# Altium PCB GearBOX-Axis.PcbDoc
Units mm, origin at the board's own origin, x right, y up, seen from the top; angles counter-clockwise.
Board outline 22 x 22 mm, 2 copper layers (Top Layer, Bottom Layer), stack 1.18 mm thick; 3 components, 4 nets, 14 pads, 0 vias.
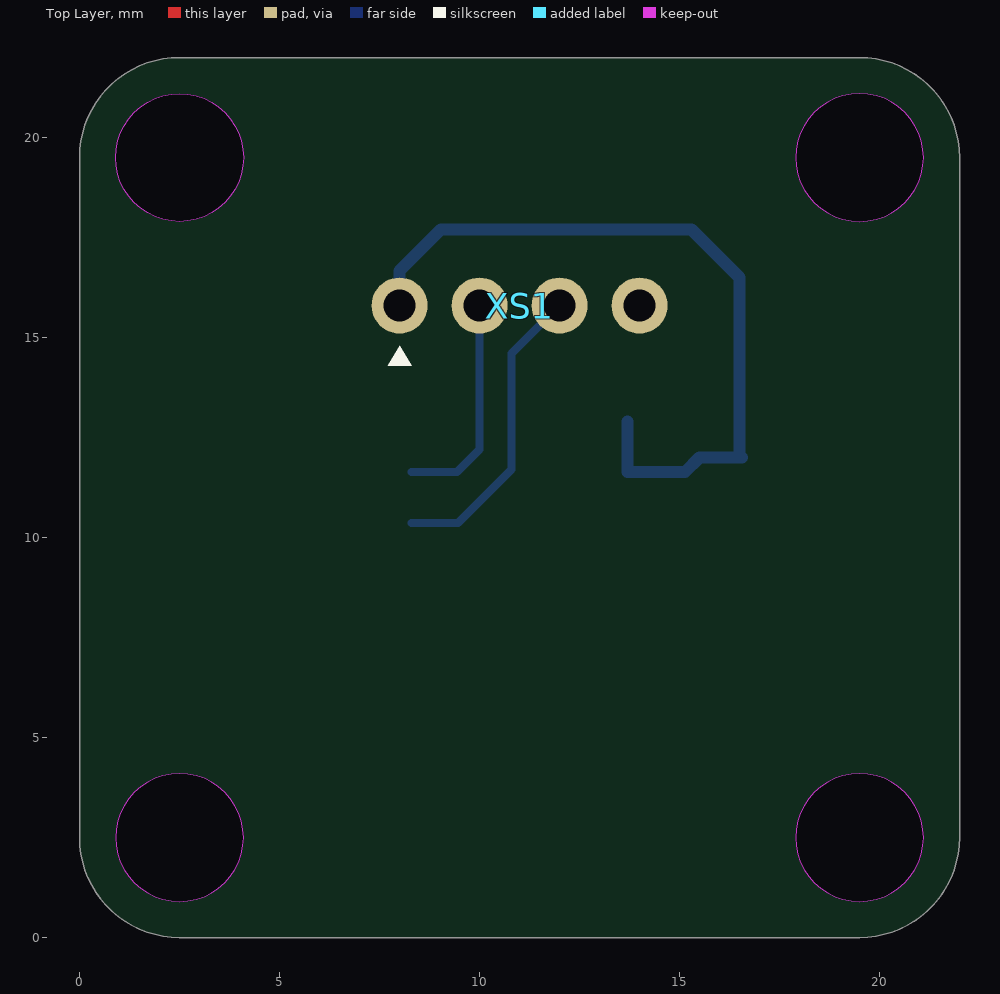
[diagram p0: Top Layer view]
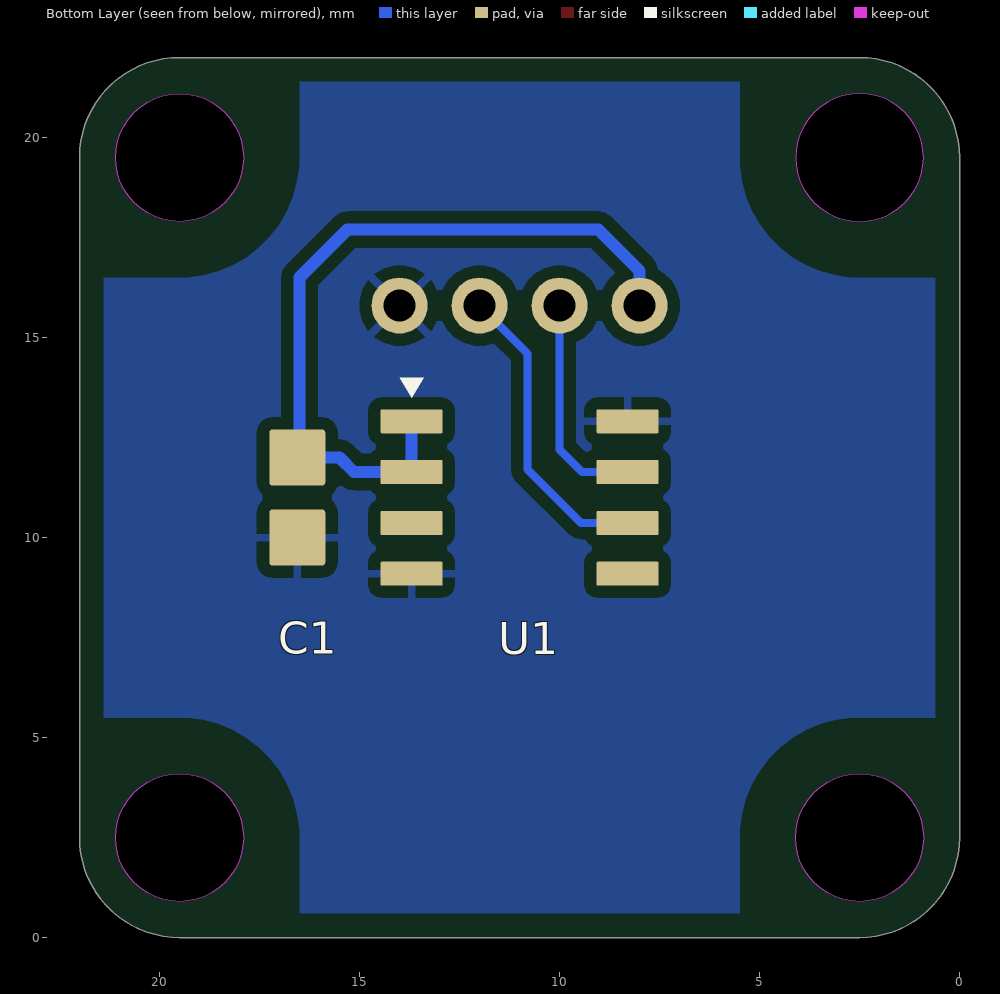
[diagram p1: Bottom Layer view, seen from below]

## Layer stack, top to bottom
Top Solder: solder mask 0.0102, Solder Resist, Dk 3.5
Top Layer: signal copper 0.0175
Dielectric 1: core 1.145, FR4 (IPC-4101/21), Dk 4.6
Bottom Layer: signal copper 0.0175
Bottom Solder: solder mask 0.0102, Solder Resist, Dk 3.5

## Board outline
0,2.5 ccw(c2.5,2.5) 2.5,0 19.5,0 ccw(c19.5,2.5) 22,2.5 22,19.5 ccw(c19.5,19.5) 19.5,22 2.5,22 ccw(c2.5,19.5) 0,19.5
cut-out: 17.9,19.5 ccw(c19.5,19.5) 19.5,17.9 ccw(c19.5,19.5) 21.1,19.5 ccw(c19.5,19.5) 19.5,21.1 ccw(c19.5,19.5)
cut-out: 17.9,2.5 ccw(c19.5,2.5) 19.5,0.9 ccw(c19.5,2.5) 21.1,2.5 ccw(c19.5,2.5) 19.5,4.1 ccw(c19.5,2.5)
cut-out: 0.9,2.5 ccw(c2.5,2.5) 2.5,0.9 ccw(c2.5,2.5) 4.1,2.5 ccw(c2.5,2.5) 2.5,4.1 ccw(c2.5,2.5)
cut-out: 2.5,17.9 cw(c2.5,19.5) 0.9,19.5 cw(c2.5,19.5) 2.5,21.1 cw(c2.5,19.5) 4.1,19.5 cw(c2.5,19.5)

## Design rules (kind name [scope] priority, off if disabled: settings)
AcuteAngle [All] p1: minimum=4.50000000000000E+0001 checktracksonly=TRUE
BoardOutlineClearance "NanoPi-NEO BoardOutlineClearance" [WithinRoom('NanoPi-NEO Board Room')] p1: gap=0.4 ignorepadtopadclearanceinfootprint=FALSE
BoardOutlineClearance [All] p2: gap=0.6 ignorepadtopadclearanceinfootprint=FALSE
Clearance [All] p1: gap=0.3 ignorepadtopadclearanceinfootprint=FALSE
ComponentClearance [All] p1: gap=-0.2 collisioncheckmode=3 verticalgap=0.2 showdistances=FALSE
Height "NanoPi-NEO Connector Avoid" [(WithinRoom('NanoPi-NEO Ethernet Room')or WithinRoom('NanoPi-NEO USB Room')) and OnTopLayer] p1: minheight=0 maxheight=1.2 prefheight=1
Height "NanoPi-NEO Board Avoid" [WithinRoom('NanoPi-NEO Board Room') and OnTopLayer] p2: minheight=0 maxheight=13.5 prefheight=13
Height "Height Top" [OnTop] p3: minheight=0 maxheight=20 prefheight=20
Height "Height Bottom" [OnBottom] p4: minheight=0 maxheight=3 prefheight=3
HoleSize [All] p1: absolutevalues=TRUE maxlimit=2539.975 minlimit=0.3 maxpercent=80.000 minpercent=20.000
HoleToHoleClearance [All] p1: gap=0.2 allowstackedmicrovias=TRUE
MinimumSolderMaskSliver MinimumSolderMaskSliver_1 [WithinRoom('ChargerRoom')] p1: minsoldermaskwidth=0.1
MinimumSolderMaskSliver [All] p2: minsoldermaskwidth=0.1
PolygonConnect [All] p1: thpad.connectstyle=Relief thpad.reliefconductorwidth=0.2 thpad.reliefentries=4 thpad.polygonreliefangle="45 Angle" thpad.airgapwidth=0.3 smdpad.connectstyle=Relief smdpad.reliefconductorwidth=0.2 smdpad.reliefentries=4 smdpad.polygonreliefangle="90 Angle" smdpad.airgapwidth=0.3 via.connectstyle=Direct via.reliefconductorwidth=0.254 via.reliefentries=4 via.polygonreliefangle="90 Angle" via.airgapwidth=0.254
RoutingVias [All] p1: holewidth=0.3 width=0.6 viastyle="Through Hole" minholewidth=0.3 minwidth=0.6 maxholewidth=1 maxwidth=2
SilkToSilkClearance [All] p1: silktosilkclearance=-100
SilkToSolderMaskClearance [IsPad] p1: minsilkscreentomaskgap=0 clearancetoexposedcopper=TRUE
SolderMaskExpansion ViaTent [IsVia] p1: expansion=0.102 istentingtop=TRUE
SolderMaskExpansion SolderMaskExpansion_1 [WithinRoom('ChargerRoom')] p2: expansion=0.05 istentingtop=FALSE
SolderMaskExpansion [All] p3: expansion=0.102 istentingtop=FALSE
Width [All] p1: maxlimit=10 minlimit=0.2 preferedwidth=0.2
23 further rules are at their usual default settings.

## Components (designator, comment, footprint, x,y, rotation, side; value= is the part's Value field where it differs from the comment)
C1 "CL21B104MBFNNNE" Normal_Capacitor_Standard_0805-L2000-W1250-BW500-H1350 16.557,11 r90 bottom value=100N/X7R/50V/±20%
U1 "AS5600-ASOT" 8-SOIC 11,11 r180 bottom
XS1 "DS1066-04MRW6XB" DS1066-04MRW6XB 11,15.8 r0 top

## Footprints (in the part's own frame and the unit in brackets; to place one, negate y for a bottom-side part, rotate by r counter-clockwise, add the part's x,y. Pads: shape width x height; smd on the part's side, far side on the other; paste and mask are expansions set on the pad)
8-SOIC [mm] "SOIC, 8-Leads, Body 4,91x3,90mm, Pitch 1,27mm, IPC Medium Density"
  rrect10% 1.55x0.6 smd: 1(-2.7,1.905) 2(-2.7,0.635) 3(-2.7,-0.635) 4(-2.7,-1.905) 5(2.7,-1.905) 6(2.7,-0.635) 7(2.7,0.635) 8(2.7,1.905)
  silkscreen extent -3,2.5 -2.4,3, body extent -3,-2.5 3,2.5, height 1.75
DS1066-04MRW6XB [mm] "PCB Connector 2.5mm PH Type"
  round 1.4 hole 0.8: 1(-3,0) 2(-1,0) 3(1,0) 4(3,0)
  silkscreen extent -3.3,-1.5 -2.7,-1, body extent -4.95,-0.25 4.95,6.25, height 5.01
Normal_Capacitor_Standard_0805-L2000-W1250-BW500-H1350 [mm]
  rrect10% 1.4x1.4 smd: 1(-1,0) 2(1,0)
  body extent -1,-0.63 1,0.63, height 1.35

## Part data
C1: "Ceramic Capacitor SMD 0805", Manufacturer="SAMSUNG ELECTRO-MECHANICS"
XS1: Manufacturer="CONNFLY ELECTRONIC CO.,LTD."

## Nets (pads, with @x,y where several pads share a name; then routed paths per layer and width w, separated by ;. In a path a pad name is that pad's centre, name@x,y a point inside that pad or via, vN(x,y) a via of type N, cw(c..) or ccw(c..) an arc to the next point about the centre after c; other vN are vias at no path point)
GND: C1.1 U1.4 U1.8 XS1.4
I2C.SCL: U1.7 XS1.2 | length 5.5
  Bottom Layer w0.2: U1.7 9.435,11.635 10,12.2 XS1.2
I2C.SDA: U1.6 XS1.3 | length 7.7
  Bottom Layer w0.2: U1.6 9.465,10.365 10.8,11.7 10.8,14.6 XS1.3
P3V3: C1.2 U1.1 U1.2 XS1.1 | length 19.1
  Bottom Layer w0.3: XS1.1 8,16.668 9.032,17.7 15.3,17.7 16.5,16.5 16.5,12.057 C1.2 15.5,12 15.135,11.635 U1.2 U1.1
pads on no net: U1.3 U1.5

## Polygon pours and split planes (outlines as drawn)
GND on Bottom Layer "NONET_L-01_P-001" (solid, remove dead copper, pour order 0): 0,22 0,0 22,0 22,22 17.219,22

## Other copper
Bottom Layer:
  pour cut-out: 16.5,22 16.5,19.5 ccw(c19.5,19.5) 19.5,16.5 22,16.5 22,19.5 ccw(c19.5,19.5) 19.5,22 19.466,22
  pour cut-out: 22,5.5 19.5,5.5 ccw(c19.5,2.5) 16.5,2.5 16.5,0 19.5,0 ccw(c19.5,2.5) 22,2.5 22,2.534
  pour cut-out: 5.5,0 5.5,2.5 ccw(c2.5,2.5) 2.5,5.5 0,5.5 0,2.5 ccw(c2.5,2.5) 2.5,0 2.534,0
  pour cut-out: 0,16.5 2.5,16.5 ccw(c2.5,19.5) 5.5,19.5 5.5,22 2.5,22 ccw(c2.5,19.5) 0,19.5 0,19.466

## Silkscreen, mask and mechanical layers (free items; w line width, h text height)
Board:
  lines w0.1: 0,2.5 ccw(c2.5,2.5) 2.5,0 19.5,0 ccw(c19.5,2.5) 22,2.5 22,19.5 ccw(c19.5,19.5) 19.5,22 2.5,22 ccw(c2.5,19.5) 0,19.5 0,2.5 ; 0.9,2.5 cw(c2.5,2.5) 2.5,4.1 cw(c2.5,2.5) 4.1,2.5 cw(c2.5,2.5) 2.5,0.9 cw(c2.5,2.5) 0.9,2.5 ; 0.9,19.5 cw(c2.5,19.5) 2.5,21.1 cw(c2.5,19.5) 4.1,19.5 cw(c2.5,19.5) 2.5,17.9 cw(c2.5,19.5) 0.9,19.5 ; 17.9,2.5 cw(c19.5,2.5) 19.5,4.1 cw(c19.5,2.5) 21.1,2.5 cw(c19.5,2.5) 19.5,0.9 cw(c19.5,2.5) 17.9,2.5 ; 17.9,19.5 cw(c19.5,19.5) 19.5,21.1 cw(c19.5,19.5) 21.1,19.5 cw(c19.5,19.5) 19.5,17.9 cw(c19.5,19.5) 17.9,19.5
Board Shape:
  circle w0.1: c19.5,19.5 r1.6
  circle w0.1: c19.5,2.5 r1.6
  circle w0.1: c2.5,2.5 r1.6
  circle w0.1: c2.5,19.5 r1.6
  lines w0.1: 0,19.466 0,16.5 2.5,16.5 ccw(c2.5,19.5) 5.5,19.5 5.5,22 2.5,22 ; 2.5,22 ccw(c2.5,19.5) 0,19.5 0,2.5 ccw(c2.5,2.5) 2.5,0 19.5,0 ccw(c19.5,2.5) 22,2.5 22,19.5 ccw(c19.5,19.5) 19.5,22 2.5,22